# Altium PCB PCB-CPU-fixe1.PcbDoc (part 3 of 3)
Units mil, origin at the board's own origin, x right, y up, seen from the top; angles counter-clockwise.
Board outline 6040 x 4120 mil, 6 copper layers (Top Layer, GND, Mid-Layer2, Mid-Layer3, VDD33, Bottom Layer); 111 components, 315 nets, 963 pads, 730 vias.
Unrouted connection lines stored in the file: 3.
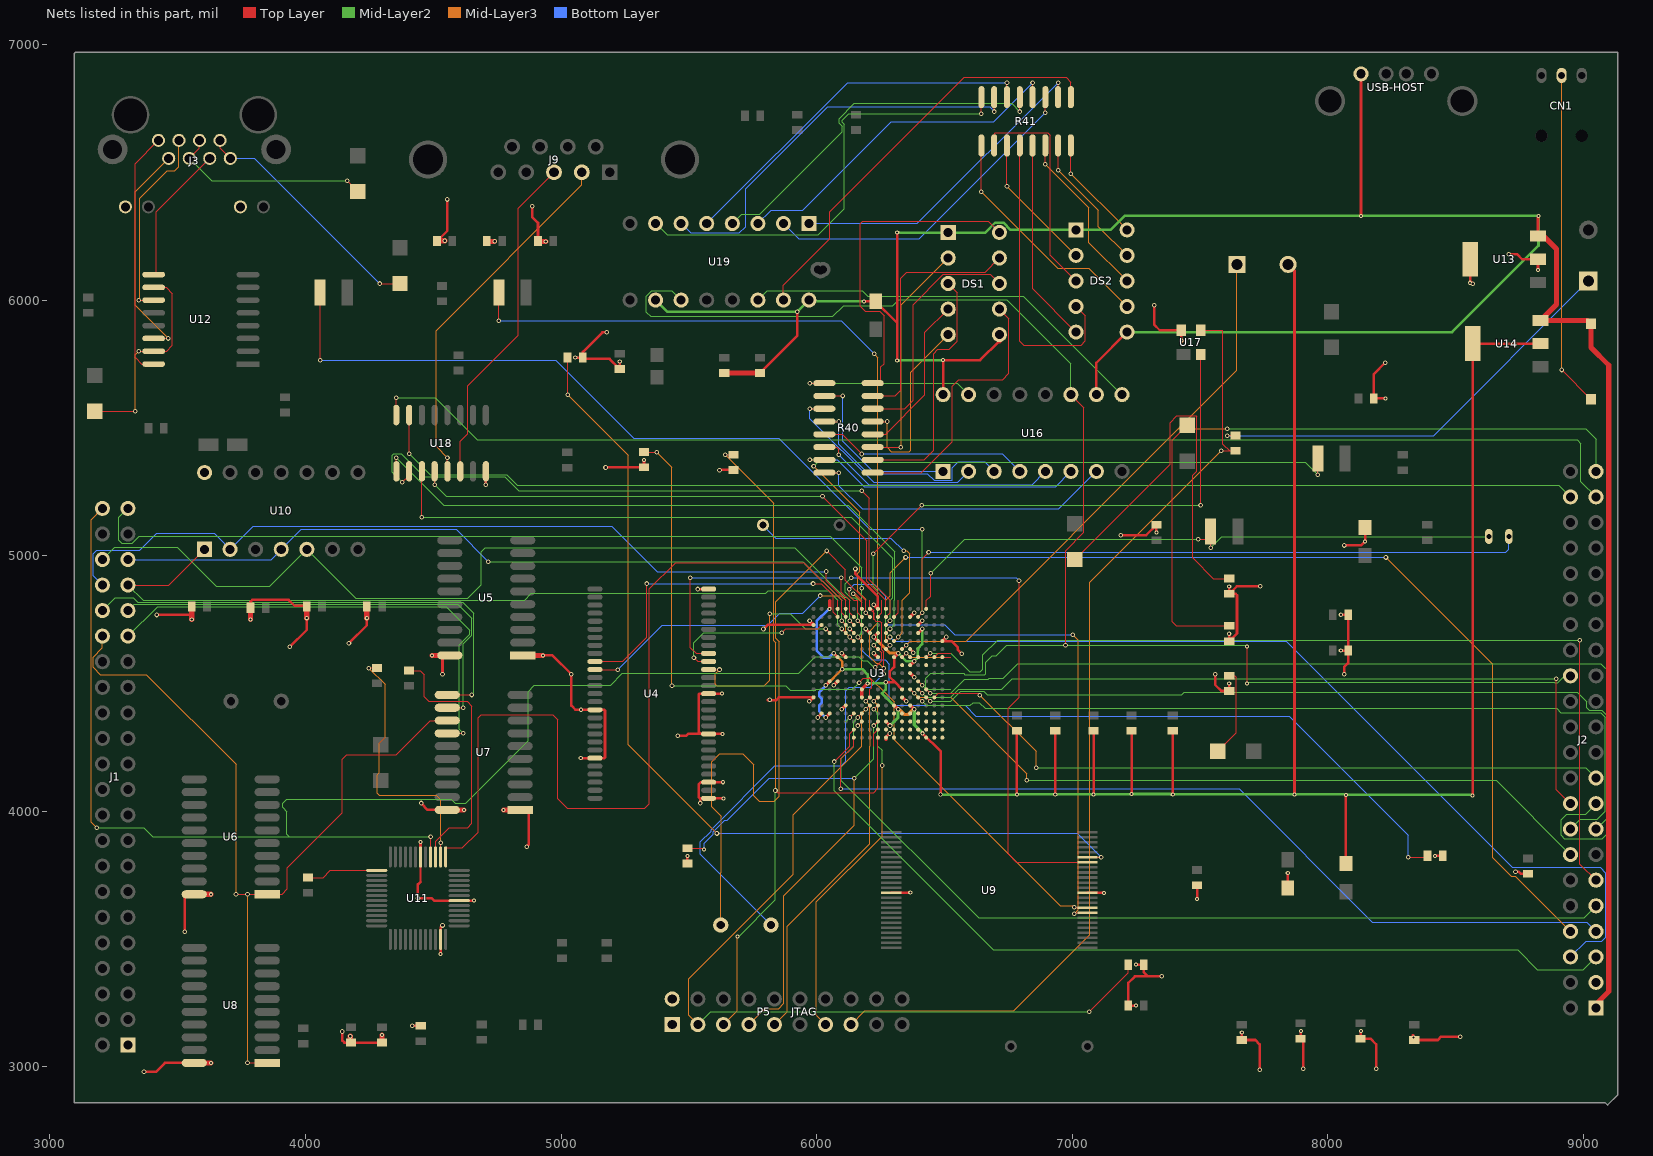
[diagram p7: the nets of this part, all layers, seen from the top]

## Via types
v1: diameter 18, hole 10, Top Layer to Bottom Layer, 574 vias
v2: diameter 16, hole 8, Top Layer to Bottom Layer, 155 vias
v3: diameter 16, hole 12, Top Layer to Bottom Layer, 1 vias

## Nets (pads, with @x,y where several pads share a name; then routed paths per layer and width w, separated by ;. In a path a pad name is that pad's centre, name@x,y a point inside that pad or via, vN(x,y) a via of type N, cw(c..) or ccw(c..) an arc to the next point about the centre after c; other vN are vias at no path point) (continued)
NetD2_2: D2.2 R23.2 | length 1542.8
  Top Layer w4: R23.2@7010,4985 7383,5358 7383,5521 7409,5547 7485,5547 7487,5545 7487,5331 7471,5315 7471,4992.47 7553,4910.47 D2.2@7614.58,4910.47
NetD3_2: D3.2 R24.2 | length 1021.8
  Top Layer w4: R24.2@7450,5510 7392,5452 7392,4741.47 7408,4725.47 D3.2@7614.58,4725.47
NetD4_2: D4.2 R25.2 | length 349.3
  Top Layer w4: R25.2@7570,4234.86 7642,4306.86 7642,4524.47 7636,4530.47 D4.2@7614.58,4530.47
NetDS1_2: DS1.2 R40.11 | length 927.1
  Top Layer w4: R40.11@6219.49,5425 v1(6330,5425)
  Mid-Layer3 w4: v1(6330,5425) 6331,5426 6331,5981 DS1.2@6515,6165
NetDS1_3: DS1.3 R40.10 | length 986
  Top Layer w4: R40.10@6219.49,5375 6421,5375 6458,5412 6458,5791 6475,5808 6519,5808 6551,5840 6551,6029 DS1.3@6515,6065
NetDS1_4: DS1.4 R40.12 | length 642
  Top Layer w4: R40.12@6219.49,5475 6270,5475 6424,5629 6424,5874 DS1.4@6515,5965
NetDS1_5: DS1.5 R40.13 | length 772.5
  Top Layer w4: R40.13@6219.49,5525 v1(6276,5525)
  Mid-Layer3 w4: v1(6276,5525) 6276,5424 6293,5407 6363,5407 6368,5412 6368,5718 DS1.5@6515,5865
NetDS1_7: DS1.7 R40.9 | length 1087.7
  Top Layer w4: R40.9@6219.49,5325 6410,5325 6531,5446 6531,5663 6557,5689 6728,5689 6752,5713 6752,5928 DS1.7@6715,5965
NetDS1_8: DS1.8 R40.14 | length 947.3
  Top Layer w4: R40.14@6219.49,5575 6345,5575 6378,5608 6378,5982.53 6496,6100.53 6679.47,6100.53 DS1.8@6715,6065
NetDS1_9: DS1.9 R40.15 | length 976.7
  Top Layer w4: R40.15@6219.49,5625 6308,5625 6330,5647 6330,6086.53 6352.47,6109 6659,6109 DS1.9@6715,6165
NetDS1_10: DS1.10 R40.16 | length 1297.2
  Top Layer w4: R40.16@6219.49,5675 6251,5675 6251,5739 6264,5752 6264,5939 6247,5956 6191,5956 6171,5976 6171,6298 6181,6308 6672,6308 DS1.10@6715,6265
NetDS2_2: DS2.2 R41.11 | length 542.3
  Top Layer w4: v1(6745,6445) R41.11@6745,6605.51
  Mid-Layer3 w4: v1(6745,6445) DS2.2@7015,6175
NetDS2_3: DS2.3 R41.10 | length 881.5
  Top Layer w4: R41.10@6695,6605.51 6695,6650 6700,6655 6904,6655 6914,6645 6914,6176 DS2.3@7015,6075
NetDS2_4: DS2.4 R41.12 | length 1185.5
  Top Layer w4: R41.12@6795,6605.51 6795,5840 6811,5824 7035,5824 7052,5841 7052,5938 DS2.4@7015,5975
NetDS2_5: DS2.5 R41.13 | length 800.9
  Top Layer w4: R41.13@6845,6605.51 6845,6045 DS2.5@7015,5875
NetDS2_7: DS2.7 R41.9 | length 937.5
  Top Layer w4: v1(6645,6424) R41.9@6645,6605.51
  Mid-Layer3 w4: v1(6645,6424) 6944,6125 7065,6125 DS2.7@7215,5975
NetDS2_8: DS2.8 R41.14 | length 663.1
  Top Layer w4: v1(6895,6531) R41.14@6895,6605.51
  Mid-Layer3 w4: v1(6895,6531) 7065,6361 7065,6225 DS2.8@7215,6075
NetDS2_9: DS2.9 R41.15 | length 542.3
  Top Layer w4: v1(6945,6508) R41.15@6945,6605.51
  Mid-Layer3 w4: v1(6945,6508) 7102,6351 7102,6288 DS2.9@7215,6175
NetDS2_10: DS2.10 R41.16 | length 421.6
  Top Layer w4: v1(6995,6495) R41.16@6995,6605.51
  Mid-Layer3 w4: v1(6995,6495) DS2.10@7215,6275
NetJ3_1: J3.1 U12.16 | length 970.4
  Top Layer w4: U12.16@3405.71,5750 3359,5750 3333,5776 3333,6533.59 J3.1@3424.45,6625.04
NetJ3_2: J3.2 U12.14 | length 870.6
  Top Layer w4: U12.14@3405.71,5850 v1(3463,5850)
  Mid-Layer3 w4: v1(3463,5850) 3333,5980 3333,6423.35 J3.2@3464.61,6554.96
NetJ3_3: J3.3 U12.11 | length 764.6
  Top Layer w4: v1(3348,6000) U12.11@3405.71,6000
  Mid-Layer3 w4: v1(3348,6000) 3352,6004 3352,6399 3459.06,6506.06 3488,6506.06 3504.76,6522.82 J3.3@3504.76,6625.04
NetJ3_4: J3.4 J3.5 R20.1 | length 800.6
  Top Layer w4: J3.4@3544.92,6554.96 3585.08,6595.12 J3.5@3585.08,6625.04 ; v1(4163,6467) R20.1@4205,6425
  Mid-Layer2 w4: J3.4@3544.92,6554.96 3632.88,6467 v1(4163,6467)
NetJ3_6: J3.6 U12.9 | length 551.9
  Top Layer w4: U12.9@3405.71,6100 3416,6100 3416,6345.72 J3.6@3625.24,6554.96
NetJ3_7: J3.7 J3.8 R21.1 | length 954.1
  Top Layer w4: J3.7@3665.39,6625.04 3665.39,6595.12 J3.8@3705.55,6554.96 ; v1(4290,6065) R21.1@4370,6065
  Bottom Layer w4: J3.8@3705.55,6554.96 3800.04,6554.96 v1(4290,6065)
NetR3_1: R3.1 U9.19 | length 3699.3
  Top Layer w4: v1(5025.47,5630.53) R3.1@5025.47,5775.42 ; U9.19@7060,3819.33 v1(7113,3819.33)
  Mid-Layer3 w4: v1(5025.47,5630.53) 5263,5393 5263,4260 v1(5610,3913)
  Bottom Layer w4: v1(5610,3913) 7019.33,3913 v1(7113,3819.33)
NetR16_2: R16.2 U11.39 | length 1045.4
  Top Layer w4: R16.2@4404.58,4550.47 4448,4550.47 4465,4533.47 4465,4448 4483,4430 4632,4430 4651,4411 4651,3952 4635,3936 4562.1,3936 4508.9,3882.8 U11.39@4508.9,3821.42
NetR17_2: R17.2 U11.38 | length 1045.2
  Top Layer w4: v1(4247,4560) 4247.47,4560.47 R17.2@4279.58,4560.47 ; U11.38@4528.58,3821.42 4528.58,3875.58 v1(4529,3876)
  Mid-Layer3 w4: v1(4247,4560) 4311,4496 4311,4289 4288,4266 4288,4150.5 4280,4142.5 4280,4070 4288,4062 4512,4062 4529,4045 v1(4529,3876)
NetR18_2: R18.2 U11.1 | length 280.5
  Top Layer w4: R18.2@4009.58,3740.47 4069.21,3740.47 4097,3768.27 U11.1@4278.58,3768.27
NetR19_1: R19.1 U12.10 U12.15 | length 826
  Top Layer w4: R19.1@3175,5565 v1(3334,5565) ; v1(3348.02,5800) U12.15@3405.71,5800 3456,5800 3479,5823 3479,6025 3454,6050 U12.10@3405.71,6050
  Mid-Layer3 w4: v1(3334,5565) 3334,5785.98 v1(3348.02,5800)
NetR28_2: R28.2 S2.1 | length 1696.4
  Top Layer w4: v1(7607,5470) 7607.47,5470.47 R28.2@7639.58,5470.47
  Bottom Layer w4: v1(7607,5470) 8415,5470 S2.1@9020,6075
NetR40_1: R40.1 U16.15 | length 696.2
  Top Layer w4: v1(5974,5675) R40.1@6030.51,5675
  Mid-Layer2 w4: v1(5974,5675) 6550,5675 U16.15@6595,5630
NetR40_2: R40.2 U16.1 | length 690.1
  Top Layer w4: R40.2@6030.51,5625 v1(6102,5625)
  Bottom Layer w4: v1(6102,5625) 6103,5624 6103,5447.4 6220.4,5330 U16.1@6495,5330
NetR40_3: R40.3 U16.2 | length 837.9
  Top Layer w4: v1(5974,5575) R40.3@6030.51,5575
  Bottom Layer w4: v1(5974,5575) 5974,5536.03 6223.56,5286.47 6551.47,5286.47 U16.2@6595,5330
NetR40_4: R40.4 U16.3 | length 885.9
  Top Layer w4: R40.4@6030.51,5525 v1(6087,5525)
  Bottom Layer w4: v1(6087,5525) 6087,5437.03 6203.03,5321 6432.94,5321 6459.47,5294.47 6530.53,5294.47 6531,5294.94 6531,5344.47 6553.53,5367 6658,5367 U16.3@6695,5330
NetR40_5: R40.5 U16.4 | length 824.5
  Top Layer w4: R40.5@6030.51,5475 6100,5475 v1(6177,5398)
  Bottom Layer w4: v1(6177,5398) 6727,5398 U16.4@6795,5330
NetR40_6: R40.6 U16.5 | length 959.2
  Top Layer w4: R40.6@6030.51,5425 6079,5425 6087,5417 v1(6087,5395.44)
  Bottom Layer w4: v1(6087,5395.44) 6203.96,5278.47 6843.47,5278.47 U16.5@6895,5330
NetR40_7: R40.7 U16.6 | length 1145.5
  Top Layer w4: v1(5974,5375) R40.7@6030.51,5375
  Bottom Layer w4: v1(5974,5375) 6081,5375 6185.53,5270.47 6935.47,5270.47 U16.6@6995,5330
NetR40_8: R40.8 U16.7 | length 1214.1
  Top Layer w4: R40.8@6030.51,5325 v1(6087,5325)
  Bottom Layer w4: v1(6087,5325) 6087,5274 6178,5183 6948,5183 U16.7@7095,5330
NetR41_1: R41.1 U19.15 | length 1648.6
  Top Layer w4: U19.15@5870,6000 5870,6058 6052,6240 6052,6346 6578,6872 6976,6872 6995,6853 R41.1@6995,6794.49
NetR41_2: R41.2 U19.1 | length 1259.7
  Top Layer w4: R41.2@6945,6794.49 v1(6945,6851)
  Bottom Layer w4: U19.1@5970,6300 6394,6300 v1(6945,6851)
NetR41_3: R41.3 U19.2 | length 1315
  Top Layer w4: v1(6895,6734) R41.3@6895,6794.49
  Bottom Layer w4: U19.2@5870,6300 5930,6240 6401,6240 v1(6895,6734)
NetR41_4: R41.4 U19.3 | length 1359.7
  Top Layer w4: R41.4@6845,6794.49 v1(6845,6851)
  Bottom Layer w4: U19.3@5770,6300 5822,6352 5946,6352 6293,6699 6693,6699 v1(6845,6851)
NetR41_5: R41.5 U19.4 | length 1436.5
  Top Layer w4: v1(6795,6738) R41.5@6795,6794.49
  Mid-Layer2 w4: U19.4@5670,6300 5707,6337 5778,6337 6100,6659 6100,6680.47 6088,6692.47 6088,6710.47 6147.53,6770 6763,6770 v1(6795,6738)
NetR41_6: R41.6 U19.5 | length 1459.7
  Top Layer w4: R41.6@6745,6794.49 v1(6745,6851)
  Bottom Layer w4: U19.5@5570,6300 6121,6851 v1(6745,6851)
NetR41_7: R41.7 U19.6 | length 1594.6
  Top Layer w4: v1(6695,6738) R41.7@6695,6794.49
  Bottom Layer w4: U19.6@5470,6300 5507,6263 5698,6263 5723,6288 5723,6435 6044,6756 6677,6756 v1(6695,6738)
NetR41_8: R41.8 U19.7 | length 1768.6
  Top Layer w4: v1(6645,6729) R41.8@6645,6794.49
  Mid-Layer2 w4: U19.7@5370,6300 5415,6255 6006,6255 6108,6357 6108,6688.47 6101,6695.47 6101,6704 6126,6729 v1(6645,6729)
NetU16_9: U16.9 U19.14 | length 1608.9
  Mid-Layer2 w4: U19.14@5770,6000 5807,6037 6179,6037 6200,6016 6809,6016 U16.9@7195,5630
NFCE: U3.G17 U9.9 | length 1744.1
  Top Layer w4: v1(6143,4851) 6150.85,4851 6177.01,4824.84 U3.G17@6177.01,4791.97 ; v1(7008,3623.45) 7008.97,3622.48 U9.9@7060,3622.48
  Mid-Layer3 w4: v1(6143,4851) 6177,4817 6177,4554 6303,4428 6303,4280.48 6953,3630.48 7000.97,3630.48 v1(7008,3623.45)
NFRE: U3.G16 U9.8 | length 2322.8
  Top Layer w4: v1(6128,4868) 6127,4867 6127,4844 6146.16,4824.84 6161.26,4824.84 6161.26,4776.22 U3.G16@6177.01,4760.47 ; v1(7008,3599) 7011.8,3602.8 U9.8@7060,3602.8
  Mid-Layer3 w4: v1(7003,4690) 7023,4670 7023,3614 v1(7008,3599)
  Bottom Layer w4: v1(6128,4868) 6148,4888 6225,4888 6271,4842 6271,4738 6280,4729 6502,4729 6541,4690 v1(7003,4690)
NFWE: U3.G15 U9.18 | length 2304.7
  Top Layer w4: v1(6161.26,4744.72) U3.G15@6177.01,4728.98 ; v1(6792,4902) 6792,4445.95 6749,4402.95 6749,3832.79 6782.14,3799.65 U9.18@7060,3799.65
  Mid-Layer2 w4: v1(6135.66,4913.52) 6112,4889.87 6112,4856.16 6133.16,4835 6151.1,4835 6161.26,4824.84 v1(6161.26,4744.72)
  Bottom Layer w4: v1(6135.66,4913.52) 6780.48,4913.52 v1(6792,4902)
NGCS0: U3.D17 | length 32.9
  Top Layer w4: U3.D17@6082.52,4791.97 6082.52,4824.84
NGCS1: J1.39 U3.E15 U10.4 | length 3059.8
  Top Layer w4: v1(6098.27,4744.72) U3.E15@6114.02,4728.98
  Mid-Layer2 w4: v1(4715,4977) 5946.11,4977 6098.27,4824.84 v1(6098.27,4744.72)
  Bottom Layer w4: J1.39@3305,4985 3865,4985 U10.4@3905,5025 3983,5103 4589,5103 v1(4715,4977)
NGCS2: U3.E16 U11.37 | length 3417.4
  Top Layer w4: U11.37@4548.27,3821.42 4548.27,3857 4614,3857 4675,3918 4675,4365 4687,4377 4968,4377 4987,4358 4987,4049 5024,4012 5327,4012 5345,4030 5345,4870 5448,4973 5950.11,4973 6098.27,4824.84 6098.27,4776.22 U3.E16@6114.02,4760.47
NGCS3: J1.37 U3.E14 U10.1 | length 3330.7
  Top Layer w4: J1.37@3305,4885 3465,4885 U10.1@3605,5025 ; v1(6098.27,4713.23) U3.E14@6114.02,4697.48
  Mid-Layer2 w4: J1.37@3305,4885 3364,4826 4857,4826 4884,4853 5801,4853 5810,4862 6045.36,4862 6082.52,4824.84 6082.52,4728.98 v1(6098.27,4713.23)
NGCS4: J1.38 U3.E17 U10.2 | length 3353.7
  Top Layer w4: v1(6037,4938) 6037,4901.86 6114.02,4824.84 U3.E17@6114.02,4791.97
  Bottom Layer w4: J1.38@3205,4885 3169,4921 3169,5008 3183,5022 3352,5022 3417,5087 3643,5087 U10.2@3705,5025 3796,5116 5199.27,5116 5377.27,4938 v1(6037,4938)
NGCS5: J1.40 U3.F15 U10.5 | length 3493.4
  Top Layer w4: v1(6129.76,4744.72) U3.F15@6145.51,4728.98
  Mid-Layer2 w4: J1.40@3205,4985 3253.47,5033.47 3497.53,5033.47 3651,4880 3860,4880 U10.5@4005,5025 4196,4834 4635,4834 4688,4887 4688,5016 4704,5032 5913.5,5032 6107.39,4838.11 6116.49,4838.11 6129.76,4824.84 v1(6129.76,4744.72)
NOE: J1.34 U6.1 U7.13 U8.1 | length 3377.8
  Top Layer w4: v1(3728,3675) v1(3773,3675) U6.1@3850,3675 3908,3675 3929,3696 3929,3779 4144,3994 4144,4204 4161,4221 4355,4221 4489,4355 U7.13@4554.57,4355 ; v1(3773,3015) U8.1@3850,3015
  Mid-Layer3 w4: J1.34@3205,4685 3205,4639 3169.47,4603.47 3169.47,4562.53 3197,4535 3376,4535 3728,4183 v1(3728,3675) ; v1(3773,3015) v1(3773,3675)
NRESET: J1.44 U3.J12 U11.40 U17.2 | length 7945.7
  Top Layer w4: U11.40@4489.21,3821.42 v1(4489.21,3900) ; v1(6222,5008) v1(6412,5198) ; v1(6224.25,4650.24) U3.J12@6240,4634.49 6254,4620.49 6254,4588 v1(6230,4564) ; v1(7502.4,5198) U17.2@7502.4,5787.76
  Mid-Layer2 w4: v1(3183,3935) 3367,3935 3402,3900 3936,3900 ; v1(4489.21,3900) 3936,3900 ; v1(6222,5008) 6222,4880 6240,4862 6240,4665.98 v1(6224.25,4650.24) ; v1(6230,4564) 6222.89,4564 6198.89,4588 6180,4588 6164.28,4603.72 5995,4603.72 5930.28,4539 5240,4539 5194,4493 4896,4493 4871,4468 4871,4276 4627,4032 4585,4032 4570,4047 3926,4047 3910,4031 3910,4015 3927,3998 3927,3909 3936,3900 ; v1(6412,5198) v1(7502.4,5198)
  Mid-Layer3 w4: v1(3183,3935) 3161.47,3956.53 3161.47,5141.47 J1.44@3205,5185
NRSTOUT: U3.J16 | length 70.9
  Top Layer w4: U3.J16@6240,4760.47 6255.75,4776.22 6255.75,4824.84
NSCAS: U3.C14 U4.17 | length 856.1
  Top Layer w4: U4.17@5577.44,4554.49 v1(5620,4554.49) ; v1(6035.28,4713.23) U3.C14@6051.02,4697.48
  Mid-Layer2 w4: v1(5817,4772.28) 5896.1,4772.28 5955.16,4713.23 v1(6035.28,4713.23)
  Mid-Layer3 w4: v1(5620,4554.49) 5604,4538.49 5604,4497 5610,4491 5796,4491 5817,4512 v1(5817,4772.28)
NSCKE: U3.D16 U4.37 | length 1292.6
  Top Layer w4: U4.37@5132.56,4585.98 5240.98,4585.98 5335,4680 5335,4890 v1(5336,4891) ; v1(5986,4891) 6018.86,4891 6065,4844.86 6065,4825 6065,4797.81 6065.02,4777.97 U3.D16@6082.52,4760.47
  Bottom Layer w4: v1(5336,4891) v1(5986,4891)
NSCLK0: U3.F13 U4.38 | length 1281.6
  Top Layer w4: U4.38@5132.56,4554.49 5221.51,4554.49 v1(5222,4554) ; v1(6129.76,4681.73) U3.F13@6145.51,4665.98
  Mid-Layer3 w4: v1(6015,4844) 6094.86,4844 6114.02,4824.84 6114.02,4697.48 v1(6129.76,4681.73)
  Bottom Layer w4: v1(5222,4554) 5396,4728 5809,4728 5856,4775 5946,4775 v1(6015,4844)
NSCLK1: U3.F14 | length 140.4
  Top Layer w4: v1(6129.76,4713.23) U3.F14@6145.51,4697.48
  Mid-Layer2 w4: 6114.02,4824.84 6114.02,4728.98 v1(6129.76,4713.23)
NSCS0: U3.F16 U4.19 | length 1117.4
  Top Layer w4: v1(5506,4913) 5506,4640 5528.52,4617.48 U4.19@5577.44,4617.48 ; v1(6097,4913) 6097,4857.61 6129.76,4824.84 6129.76,4776.22 U3.F16@6145.51,4760.47
  Bottom Layer w4: v1(5506,4913) v1(6097,4913)
NSRAS: U3.B15 U4.18 | length 650.8
  Top Layer w4: v1(5520,4601) 5535.02,4585.98 U4.18@5577.44,4585.98 ; v1(5864,4698) 5879.23,4713.23 5955.16,4713.23 6003.78,4713.23 U3.B15@6019.53,4728.98
  Mid-Layer2 w4: v1(5520,4601) 5520,4660 5558,4698 v1(5864,4698)
NSRST: "P5      JTAG.15" R28.1 U17.3 | length 3812.6
  Top Layer w4: U17.3@7502.4,5882.24 7589,5882.24 7590,5881.24 7590,5436.47 7616,5410.47 ; v1(7583.47,5410.47) 7616,5410.47 ; R28.1@7639.58,5410.47 7616,5410.47
  Mid-Layer3 w4: 6135,3165 6189,3219 6772,3219 7069,3516 7069,4896 v1(7583.47,5410.47)
NTRST: "P5      JTAG.3" R34.2 U3.H5 | length 3358.3
  Top Layer w4: v1(6192.76,4398.27) U3.H5@6208.5,4414.02 ; v1(7067.05,3215) 7219.53,3367.47 R34.2@7219.53,3399.58
  Mid-Layer2 w4: 5535,3165 5585,3215 v1(7067.05,3215)
  Mid-Layer3 w4: 5535,3165 5499,3201 5499,3344 5908,3753 5908,3986.15 6177.01,4255.16 6177.01,4382.52 v1(6192.76,4398.27)
NWAIT: J1.43 R1.1 U3.G13 | length 6567.2
  Top Layer w4: v1(6161.26,4681.73) U3.G13@6177.01,4665.98 v1(6162,4680.99) ; v1(8315,3820) 8390.47,3820 R1.1@8390.47,3825.42
  Mid-Layer2 w4: J1.43@3305,5185 3269.47,5149.47 3269.47,5060 3280.47,5049 3322,5049 3350,5077 6053,5077 6177,4953 v1(6177,4873) ; v1(6161.26,4681.73) 6177.01,4697.48 6177.01,4824.84 ; v1(6162,4680.99) 6177,4695.99 6177,4824.85 ; 6177,4824.85 v1(6177,4873) ; 6177,4824.85 6176,4825.85 6176,4873 v1(6177,4873)
  Bottom Layer w4: v1(6177,4873) 6177,4630 6215,4592 6269,4592 6285,4576 6285,4433 6304,4414 6581,4414 6623,4372 7849,4372 8315,3906 v1(8315,3820)
NWBE0: J1.36 U7.11 | length 1916.7
  Top Layer w4: U7.11@4554.57,4455 v1(4650,4455)
  Mid-Layer2 w4: J1.36@3205,4785 3255,4835 3326,4835 3344,4817 4615,4817 4658,4774 4658,4463 v1(4650,4455)
NWBE1: J1.35 U7.12 | length 1803.4
  Top Layer w4: U7.12@4554.57,4405 v1(4617,4405)
  Mid-Layer2 w4: J1.35@3305,4785 3329,4809 4596,4809 4650,4755 4650,4688 4617,4655 v1(4617,4405)
NWE: J1.33 U7.14 | length 1913.2
  Top Layer w4: U7.14@4554.57,4305 v1(4617,4305)
  Mid-Layer2 w4: J1.33@3305,4685 3421,4801 4550,4801 4642,4709 4642,4692 4601,4651 4601,4321 v1(4617,4305)
NXPON: U3.U11 | length 32.9
  Top Layer w4: U3.U11@6491.97,4602.99 6524.84,4602.99
NYPON: U3.M11 | length 203.4
  Top Layer w4: U3.M11@6334.49,4602.99 v1(6350.24,4618.74)
  Mid-Layer3 w4: v1(6350.24,4618.74) 6365.98,4602.99 6524.84,4602.99
PDN0: U3.N11
PDP0: U3.M10 | length 1
  Top Layer w4: U3.M10@6334.49,4570.51 U3.M10@6334.49,4571.5
RS232RXD0: J9.2 U18.13 | length 1424.7
  Top Layer w4: U18.13@4555.44,5330.31 v1(4555.44,5383)
  Mid-Layer3 w4: v1(4555.44,5383) 4511,5427.44 4511,5880.62 5081.38,6451 J9.2@5081.38,6500.31
RS232RXD1: J2.41 U18.8 | length 5010.3
  Top Layer w4: U18.8@4355.44,5550.31 v1(4355.44,5618)
  Mid-Layer2 w4: v1(4355.44,5618) 4507,5618 4672,5453 8976,5453 8991,5438 8991,5289 J2.41@9050,5230
RS232TXD0: J9.3 U18.14 | length 1322
  Top Layer w4: U18.14@4605.44,5330.31 4605.44,5448 4634,5476.56 4634,5665 4832,5863 4832,6359.94 J9.3@4972.38,6500.31
RS232TXD1: J2.42 U18.7 | length 4765.9
  Top Layer w4: v1(4405.44,5399) U18.7@4405.44,5550.31
  Mid-Layer2 w4: v1(4405.44,5399) 4487.44,5317 4787,5317 4828,5276 8904,5276 J2.42@8950,5230
RXD0: U3.K17 U18.12 | length 2132.5
  Top Layer w4: v1(4505.44,5277) U18.12@4505.44,5330.31 ; v1(6023,5232) 6197,5058 6197,4899.34 6271.5,4824.84 U3.K17@6271.5,4791.97
  Mid-Layer2 w4: v1(4505.44,5277) 4550.44,5232 v1(6023,5232)
RXD1: U3.K14 U18.9 | length 2488.1
  Top Layer w4: U18.9@4355.44,5330.31 v1(4355.44,5383) ; U3.K14@6271.5,4697.48 v1(6287.24,4713.23)
  Mid-Layer2 w4: v1(4355.44,5383) 4540.44,5198 6124,5198 6306,5016 6306,4827.85 6302.99,4824.84 6302.99,4728.98 v1(6287.24,4713.23)
RXD2: J2.8 U3.K12 | length 4055.2
  Top Layer w4: U3.K12@6271.5,4634.49 v1(6287.24,4650.24)
  Mid-Layer3 w4: v1(6287.24,4650.24) 6271.5,4665.98 6271.5,4824.84 6289,4842.35 6289,4934 v1(6348,4993) ; v1(8228,4993) 8643,4578 8643,3820.09 8717.57,3745.52 8734.48,3745.52 J2.8@8950,3530
  Bottom Layer w4: v1(6348,4993) v1(8228,4993)
SDCLK: J2.19 U3.T6 | length 2770.8
  Top Layer w4: U3.T6@6460.47,4445.51 6476.22,4461.26 6524.84,4461.26 6631.74,4461.26 v1(6639,4454)
  Mid-Layer2 w4: v1(6859,4170) 9010,4170 J2.19@9050,4130
  Mid-Layer3 w4: v1(6639,4454) 6859,4234 v1(6859,4170)
SDCMD: J2.16 U3.P6 | length 3264.1
  Top Layer w4: U3.P6@6397.48,4445.51 v1(6413.23,4429.76)
  Mid-Layer2 w4: v1(6413.23,4429.76) 6428.98,4414.02 6524.84,4414.02 6602.02,4414.02 6613,4425 6637,4425 6660,4402 8896,4402 8912,4386 9068,4386 9087,4367 9087,4000 9055,3968 8988,3968 J2.16@8950,3930
SDDATA0: J2.15 U3.R6 | length 3212.8
  Top Layer w4: U3.R6@6428.98,4445.51 v1(6444.72,4429.76)
  Mid-Layer2 w4: v1(6444.72,4429.76) 6524.84,4429.76 6564.08,4469 6654,4469 6668,4455 7428,4455 7439,4466 8977,4466 9014.47,4428.53 9014.47,4404 9024,4394.47 9072,4394.47 9095,4371.47 9095,3975 J2.15@9050,3930
SDDATA1: J2.14 U3.N7 | length 2867.5
  Top Layer w4: U3.N7@6365.98,4477.01 v1(6381.73,4461.26)
  Mid-Layer2 w4: v1(6823,4121) 8659,4121 J2.14@8950,3830
  Mid-Layer3 w4: v1(6381.73,4461.26) 6397.48,4445.51 6524.84,4445.51 6823,4147.35 v1(6823,4121)
SDDATA2: J2.18 U3.P7 | length 3051.4
  Top Layer w4: U3.P7@6397.48,4477.01 v1(6413.23,4461.26) ; v1(8895,4518) 8895,4085 J2.18@8950,4030
  Mid-Layer2 w4: v1(6413.23,4461.26) 6428.98,4445.51 6524.84,4445.51 6556.33,4477 6724.89,4477 6765.89,4518 v1(8895,4518)
SDDATA3: J2.17 U3.R7 | length 3796.2
  Top Layer w4: U3.R7@6428.98,4477.01 v1(6444.72,4461.26)
  Mid-Layer2 w4: v1(6444.72,4461.26) 6524.84,4461.26 6579.58,4516 6672.14,4516 6676.14,4520 6731,4520 6788,4577 9069,4577 9103,4543 9103,3921 9075,3893 8925,3893 8913,3905 8913,3967 8935,3989 9009,3989 J2.17@9050,4030
SDWP: U3.L16 | length 70.9
  Top Layer w4: U3.L16@6302.99,4760.47 6318.74,4776.22 6318.74,4824.84
SPICLK0: J2.28 U3.P8 U16.11 U19.11 | length 6128.7
  Top Layer w4: U3.P8@6397.48,4508.5 v1(6413.23,4492.76) ; v1(6974,4650) 6974,5020 7046,5092 7046,5579 U16.11@6995,5630 ; v2(7685,4500) v2(7685,4645)
  Mid-Layer2 w4: U19.11@5470,6000 5434,6036 5354,6036 5333,6015 5333,5953 5350,5936 6064,5936 6107,5979 6298,5979 6321,6002 6745,6002 6995,5752 U16.11@6995,5630 ; v1(6413.23,4492.76) 6428.98,4477.01 6524.84,4477.01 ; 6435.99,4477.01 6428,4485 6428,4520 6447,4539 6575.54,4539 6580,4534.54 6657.54,4534.54 6661.14,4538.14 6661.14,4582.14 6687,4608 6703,4608 6745,4650 v1(6974,4650) 7680,4650 v2(7685,4645) ; v2(7685,4500) 7690,4505 8886.79,4505 8888.79,4503 8901.21,4503 8928.21,4530 J2.28@8950,4530
SPICLK1: U3.R10
TCK: "P5      JTAG.9" R37.2 U3.H6 | length 3316.6
  Top Layer w4: R37.2@5324.58,5405.47 v1(5374,5405.47) ; v1(6166,4503) 6183,4520 6206,4520 6215,4511 6215,4484 6208.5,4477.5 U3.H6@6208.5,4445.51 v1(6192.76,4429.76)
  Mid-Layer2 w4: v1(5434,4491) 5879.07,4491 5896.07,4474 5995.62,4474 5998.62,4477 6140,4477 v1(6166,4503)
  Mid-Layer3 w4: v1(5374,5405.47) 5434,5345.47 v1(5434,4491) ; 5835,3165 5885,3215 5885,3550 6208.5,3873.5 6208.5,4255.16 6209.26,4255.91 6209.26,4310.47 6208.5,4311.22 6208.5,4414.02 v1(6192.76,4429.76)
TCLK0: J2.9 U3.G4 | length 3490.6
  Top Layer w4: v1(6161.26,4366.77) U3.G4@6177.01,4382.52
  Mid-Layer2 w4: v1(6161.26,4366.77) 6145.51,4351.02 6145.51,4255.16 6097,4206.65 6097,4120 6634,3583 9003,3583 J2.9@9050,3630
TCLK1: J2.11 U3.R11 | length 3643.8
  Top Layer w4: U3.R11@6428.98,4602.99 v1(6444.72,4618.74) ; v1(8986,4669) 8987,4668 8987,3793 J2.11@9050,3730
  Mid-Layer2 w4: v1(6444.72,4618.74) 6524.84,4618.74 6598.58,4545 6640,4545 6651,4556 6651,4612 6708,4669 v1(8986,4669)
TDI: "P5      JTAG.5" R35.2 U3.J1 | length 3046.1
  Top Layer w4: v1(5642,5395) 5642.47,5395.47 R35.2@5674.58,5395.47 ; v1(5839,4081) 5847,4073 6224,4073 6240,4089 6240,4255.16 U3.J1@6240,4288.03
  Mid-Layer2 w4: v2@5690,3505 v2(5690,3510) ; v2@5692.5,3507.5 5839,3654 v1(5839,4081)
  Mid-Layer3 w4: 5635,3165 5690,3220 v2(5690,3510) ; v1(5642,5395) 5832.32,5204.68 5832.32,4666.97 5840,4659.29 5840,4082 v1(5839,4081)
TDO: "P5      JTAG.13" U3.J5 | length 1390.9
  Top Layer w4: v1(6224.25,4398.27) U3.J5@6240,4414.02
  Mid-Layer2 w4: v1(6224.25,4398.27) 6240,4382.52 6240,4255.16 6257,4238.16 v1(6257,4179)
  Mid-Layer3 w4: 6035,3165 5999,3201 5999,3645 6257,3903 v1(6257,4179)
TMS: "P5      JTAG.7" R36.2 U3.J3 | length 2222.5
  Top Layer w4: R36.2@5494.58,3855.47 5554.53,3855.47 v2(5560,3850) ; v1(6224.25,4335.28) U3.J3@6240,4351.02
  Mid-Layer2 w4: v1(6148,4129) 6224.25,4205.25 6224.25,4255.16 v1(6224.25,4335.28)
  Mid-Layer3 w4: 5735,3165 5798,3228 5851,3228 5872,3249 5872,3670 6148,3946 v1(6148,4129)
  Bottom Layer w4: v2@5560,3845 v2(5560,3850) 5560,3875 5595,3910 5595,3919.21 5640.79,3965 5650,3965 5814,4129 v1(6148,4129)
TOUT0: J2.5 U3.F2 | length 3562.9
  Top Layer w4: v1(6069,4194.39) 6129.76,4255.16 6129.76,4303.78 U3.F2@6145.51,4319.53
  Mid-Layer2 w4: v1(6069,4194.39) 6069,4080 6691,3458 8743,3458 8821,3380 9000,3380 J2.5@9050,3430
TOUT1: J2.7 U3.F1 | length 3407.1
  Top Layer w4: v1(6095,4088) 6095,4204.65 6145.51,4255.16 U3.F1@6145.51,4288.03
  Bottom Layer w4: v1(6095,4088) 7653,4088 8175,3566 9014,3566 J2.7@9050,3530
TOUT2: U3.F4 | length 44.5
  Top Layer w4: v1(6129.76,4366.77) U3.F4@6145.51,4382.52
  Mid-Layer2 w4: 6114.02,4351.02 v1(6129.76,4366.77)
TOUT3: U3.G3 | length 22.3
  Top Layer w4: v1(6161.26,4335.28) U3.G3@6177.01,4351.02
TXD0: U3.K15 U18.11 | length 2358.6
  Top Layer w4: v1(4455.44,5151) U18.11@4455.44,5330.31 ; U3.K15@6271.5,4728.98 v1(6287.24,4744.72)
  Mid-Layer2 w4: v1(4455.44,5151) 6135,5151 6297,4989 6297,4834.6 6287.24,4824.84 v1(6287.24,4744.72)
TXD1: U3.K16 U18.10 | length 2629.8
  Top Layer w4: v1(4378,5287) 4393,5302 4405.44,5302 U18.10@4405.44,5330.31 ; v1(6176,5254) 6206,5224 6206,4906.09 6287.24,4824.84 6287.24,4776.22 U3.K16@6271.5,4760.47
  Mid-Layer2 w4: v1(4378,5287) 4339,5326 4339,5393 4345,5399 4375,5399 4465,5309 4779,5309 4834,5254 v1(6176,5254)
TXD2: J2.6 U3.K13 | length 3798.2
  Top Layer w4: U3.K13@6271.5,4665.98 v1(6287.24,4681.73)
  Mid-Layer2 w4: 6271.5,4824.84 6271.5,4697.48 ; v1(6287,4682) 6271.5,4697.5 ; v1(6287.24,4681.73) 6271.5,4697.48
  Bottom Layer w4: v1(6287,4682) 6303,4666 7837,4666 8723,3780 9066,3780 9087,3759 9087,3505 9071,3489 9009,3489 J2.6@8950,3430
UPLLCAP: C2.2 U3.L13 | length 987.1
  Top Layer w4: U3.L13@6302.99,4665.98 v1(6318.74,4681.73)
  Mid-Layer3 w4: v1(6318.74,4681.73) 6334.49,4697.48 6334.49,4824.84 6364,4854.35 6364,5007 6352,5019 v1(6341,5019)
  Bottom Layer w4: C2.2@5790,5120 5841,5069 6291,5069 v1(6341,5019)
VCLK: U3.J2 | length 70.9
  Top Layer w4: 6224.25,4255.16 6224.25,4303.78 U3.J2@6240,4319.53
VD0: U3.L1
VD1: U3.L2
VD2: U3.L4
VD3: U3.M3
VD4: U3.M4
VD5: U3.M2
VD6: U3.N1
VD7: U3.N3
VD8: U3.N2
VD9: U3.N4
VD10: U3.P1
VD11: U3.P3
VD12: U3.P2
VD13: U3.T1
VD14: U3.R2
VD15: U3.U1
VD16: U3.T2
VD17: U3.R3
VD18: U3.R4
VD19: U3.U2
VD20: U3.T3
VD21: U3.U3
VD22: U3.T4
VD23: U3.P4
VDD18: C10.1 C11.1 C12.1 C13.1 C32.1 C48.1 D5.3 U3.C4 U3.C8 U3.C17 U3.D11 U3.G6 U3.G7 U3.J13 U3.J14 U3.K3 U3.L5 U3.L11 U3.M7 U3.N5 U3.N10 U3.P14 U3.R1 U14.2 U14.4 | length 10077.1
  Top Layer w10: v1(6035.28,4492.76) U3.C8@6051.02,4508.5 ; v1(6066.77,4618.74) U3.D11@6082.52,4602.99 ; v1(6270,4505) 6306.5,4505 ; U3.L11@6302.99,4602.99 6302.99,4563.86 6286.12,4546.99 6286.12,4525.38 6306.5,4505 ; U3.M7@6334.49,4477.01 6306.5,4505 ; U3.R1@6428.98,4288.03 6428.98,4291.02 v2(6415,4305) 6485,4235 v3(6485,4065) ; v2(6783.79,4066.21) C11.1@6783.79,4314.74 ; v2(6933.79,4066.21) C32.1@6933.79,4314.74 ; v2(7083.79,4066.21) C12.1@7083.79,4314.74 ; v2(7232.58,4067.42) C10.1@7232.58,4314.48 ; v2(7393.79,4066.21) C13.1@7393.79,4314.74 ; D5.3@7845,6140 7870,6115 v2(7870,4065) ; C48.1@8071.2,3795.44 v2(8071.2,4063.8) ; v2(8567.13,4062.13) U14.4@8567.13,5830 U14.2@8832.87,5830
  Top Layer w12.6: v1(6035.28,4366.77) U3.C4@6051.02,4382.52 ; v2(6051.02,4791.97) 6051.02,4824.84 ; U3.G6@6177.01,4445.51 U3.G7@6177.01,4477.01 v2(6200,4500) ; U3.J13@6240,4665.98 v1(6224.25,4681.73) U3.J14@6240,4697.48 ; U3.K3@6271.5,4351.02 v1(6287.24,4335.28) ; U3.L5@6302.99,4414.02 v1(6318.74,4398.27) ; U3.L11@6302.99,4602.99 v1(6318.74,4618.74) ; U3.N5@6365.98,4414.02 v1(6381.73,4398.27) ; U3.N10@6365.98,4571.5 v1(6381.73,4587.24) ; U3.P14@6397.48,4697.48 v1(6413.23,4713.23)
  Mid-Layer2 w10: v1(6100.24,4555.75) 6179.25,4555.75 6200,4535 v2(6200,4500) 6265,4500 v1(6270,4505) 6270,4475.51 6255.75,4461.26 v1(6318.74,4398.27) ; v1(6318.74,4618.74) 6350.24,4587.24 v1(6381.73,4587.24) 6396.47,4601.98 6396.47,4637.47 6413.23,4654.23 v1(6413.23,4713.23) ; v3(6485,4065) 6782.58,4065 v2(6783.79,4066.21) v2(6933.79,4066.21) v2(7083.79,4066.21) 7231.36,4066.21 v2(7232.58,4067.42) v2@7392.58,4067.42 ; v2(7393.79,4066.21) v2@8068.79,4066.21 ; v2(8071.2,4063.8) v2@8565.45,4063.8
  Mid-Layer2 w12.6: v1(6287.24,4335.28) 6318.74,4366.77 v1(6318.74,4398.27) ; v1(6381.73,4398.27) 6381.73,4338.27 v2(6415,4305)
  Mid-Layer3 w10: v1(6035.28,4492.76) 6037.25,4492.76 v1(6100.24,4555.75) 6100.24,4585.27 v1(6066.77,4618.74)
  Mid-Layer3 w12.6: v1(6224.25,4681.73) 6287.24,4618.74 v1(6318.74,4618.74) ; v1(6318.74,4398.27) 6322.94,4398.27 6342.24,4378.97 6358.23,4378.97 6377.53,4398.27 v1(6381.73,4398.27)
  Bottom Layer w10: v1(6035.28,4366.77) 6010,4392.05 6010,4413.92 6020.81,4424.73 6020.81,4439.65 6010,4450.46 6010,4464.83 6035.28,4490.11 v1(6035.28,4492.76) ; v2(6051.02,4791.97) 6047.63,4791.97 6000.39,4744.72 6000.39,4628.17 6027.82,4600.74 6048.77,4600.74 v1(6066.77,4618.74)
VDD33: "P5      JTAG.1" "P5      JTAG.2" C7.1 C8.1 C9.1 C14.1 C15.1 C16.1 C17.1 C18.1 C19.1 C20.1 C21.1 C22.1 C23.1 C26.1 C27.1 C30.1 C42.1 C44.1 C46.1 C49.1 D2.1 D3.1 D4.1 J1.1 J2.3 J3.9 J3.11 R1.2 R2.2 R3.2 R10.2 R11.2 R22.1 R34.1 R35.1 R36.1 R37.1 U3.A6 U3.A15 U3.B4 U3.D8 U3.E5 U3.E11 U3.H14 U3.J11 U3.J17 U3.K1 U3.M6 U3.N9 U3.N12 U3.N16 U3.P15 U3.U13 U4.1 U4.3 U4.9 U4.14 U4.27 U4.43 U4.49 U5.1 U5.20 U6.20 U7.1 U7.20 U8.20 U9.12 U9.37 U10.14 U11.23 U11.30 U11.42 U13.2 U13.4 U17.4 U18.16 | length 10142.4
  Top Layer w9.45: 4449.84,3723 U11.42@4449.84,3821.42 ; 4503,3650.16 U11.30@4601.42,3650.16 ; U11.23@4528.58,3498.58 4528.58,3545.58 v1(4536,3553)
  Top Layer w10: v1(3368,2980) 3415,2980 3450,3015 U8.20@3564.57,3015 ; v1(3418,4768) 3546.74,4768 3554.74,4776 C20.1@3554.74,4801.21 ; v1(3528,3528) 3528,3675 U6.20@3564.57,3675 ; C21.1@3784.74,4796.21 3784.74,4820 3791.74,4827 3934,4827 3957,4804 4004.74,4804 C22.1@4004.74,4801.21 v2(4004.74,4755.26) 4004.74,4709.74 v1(3938,4643) ; v1(4144,3138) 4144,3102.74 4152,3094.74 C16.1@4177.58,3094.74 C17.1@4298.79,3094.74 ; v1(4170,4658) 4239.74,4727.74 v2(4239.74,4755.26) C23.1@4239.74,4801.21 ; v1(4418.21,3160.26) C15.1@4451.21,3160.26 ; 4449.84,3723 4440,3713.16 v1(4440,3660) 4493.16,3660 4503,3650.16 ; U11.42@4449.84,3821.42 v2(4449.84,3879.84) ; v1(4453,4032) 4453,4030 4478,4005 U7.20@4554.57,4005 ; C7.1@4515.9,6232.37 4555,6271.47 v1(4555,6394) ; v2(4528.58,3441.42) U11.23@4528.58,3498.58 ; v1(4536,4536) 4536,4610 U5.20@4564.57,4610 ; U11.30@4601.42,3650.16 v2(4659.84,3650.16) v2@4660,3650 ; v1(4705.44,5277.31) U18.16@4705.44,5330.31 ; C8.1@4709.74,6231.21 4709.74,6230 4710.95,6230 v2(4740,6230) ; U7.1@4840,4005 4873,4005 4873,3869 v1(4865,3861) ; U5.1@4850,4610 v2(4930,4610) 4966,4610 v1(5040,4536) 5040,4413.01 5056,4397.01 v2(5077.99,4397.01) U4.43@5132.56,4397.01 5168,4397.01 5172,4393.01 5172,4212.03 5168,4208.03 U4.49@5132.56,4208.03 v2(5076.97,4208.03) ; v1(4887,6368) 4887,6324.74 4909.74,6302 C9.1@4909.74,6231.21 ; v2(5055.42,5775.42) R3.2@5085.47,5775.42 ; v1(5174,5345) 5174.47,5345.47 R37.1@5324.58,5345.47 v2(5324.58,5374.58) ; v1(5178,5874) 5162,5874 5085.47,5797.47 R3.2@5085.47,5775.42 ; v2(5229.58,5759.58) R22.1@5229.58,5730.47 5190.05,5770 5085.47,5770 R3.2@5085.47,5775.42 ; v1(5456,4295) 5489.48,4295 5497,4302.52 5547.48,4302.52 ; R36.1@5494.58,3795.47 v2(5494.58,3824.58) ; v1(5534.91,4869.45) U4.27@5577.44,4869.45 ; v1(5544,4032) 5544,4050.55 ; v1(5620,5335) 5620.47,5335.47 R35.1@5674.58,5335.47 ; v2(5630,4460) U4.14@5577.44,4460 5542,4460 5538,4456 5538,4312 5547.48,4302.52 ; v2(5632.48,4302.52) U4.9@5577.44,4302.52 5547.48,4302.52 ; v2(5633.54,4113.54) U4.3@5577.44,4113.54 5547.54,4113.54 5538,4104 5538,4056 5543.45,4050.55 5544,4050.55 ; v2(5635,4050) 5634.45,4050.55 U4.1@5577.44,4050.55 5544,4050.55 ; v1(5792,4713) 5807.98,4728.98 U3.A15@5988.03,4728.98 ; v1(5817,4437) 5809,4437 5809,4433.87 5840.87,4433.87 5852.51,4445.51 U3.A6@5988.03,4445.51 5973.41,4430.89 v1(5970.89,4430.89) ; v1(6152,4948) 6151.34,4948 6151.34,4928.8 6240,4840.14 U3.J17@6240,4791.97 ; 6271.5,4279.04 U3.K1@6271.5,4288.03 6271.5,4290.01 v1(6285.74,4304.26) ; U9.37@6291.98,3681.54 v2(6366.54,3681.54) ; U3.N12@6365.98,4634.49 6378.47,4622 v1(6378.47,4620.02) ; U3.U13@6491.97,4665.98 6528,4665.98 6552,4641.98 6552,4632 v1(6568,4616) ; U9.12@7060,3681.54 7123.46,3681.54 v2(7125,3680) ; v1(7190,5080) 7289.11,5080 R10.2@7329.58,5120.47 v2(7329.58,5090.42) ; v2(7249.58,3239.58) R2.2@7219.53,3239.58 7219.53,3328 7245.53,3354 7296,3354 ; v2(7250,3400) 7250.42,3399.58 R34.1@7279.53,3399.58 7279.53,3370.47 7296,3354 ; v1(7321,5980) 7321,5904 7342.76,5882.24 U17.4@7427.6,5882.24 v2(7427.6,5842.4) v2@7430,5840 ; v1(7350,3354) 7296,3354 ; v2(7488.79,3656.21) C44.1@7488.79,3709.74 ; v1(7560,4536) 7560,4494.47 7584,4470.47 D4.1@7614.58,4470.47 v2(7614.58,4499.58) ; v2(7614.58,4694.58) D3.1@7614.58,4665.47 7645,4695.89 7645,4845.47 7640,4850.47 D2.1@7614.58,4850.47 ; v2(7614.58,4879.58) D2.1@7614.58,4850.47 ; v2(7663.79,3133.79) C14.1@7663.79,3104.74 7717.26,3104.74 7734,3088 v1(7734,2989) ; v1(7736,4880) 7644.11,4880 D2.1@7614.58,4850.47 ; v2(7843.8,3758.8) C49.1@7843.8,3699.56 C49.1@7856,3699.56 ; v2@7893.79,3138.79 C26.1@7893.79,3109.74 7905,3109.74 v1(7905,2992) ; v2(8051.21,4628.79) C27.1@8080.26,4628.79 ; v2(8051.21,4768.79) C30.1@8080.26,4768.79 C27.1@8080.26,4628.79 ; v1(8064,4536) 8064,4563.74 8080.26,4580 C27.1@8080.26,4628.79 ; v1(8064,5040) 8130.2,5040 8146.2,5056 v2(8146.2,5056.2) C46.1@8146.2,5110.44 ; v2(8130,3140) 8130,3110.95 C19.1@8128.79,3109.74 8168.26,3109.74 8190,3088 v1(8190,2992) ; v1(8225,5755) 8180.47,5710.47 R11.2@8180.47,5615.42 v2(8225.42,5615.42) ; C18.1@8333.79,3094.74 8333.79,3104.74 C18.1@8333.79,3113.79 ; 8333.79,3123.79 8333.79,3115 C18.1@8333.79,3113.79 ; v2(8335,3115) C18.1@8333.79,3113.79 ; C18.1@8338.79,3104.74 8431,3104.74 8444.26,3118 v1(8518,3118) ; v2(8420.42,3825.42) R1.2@8450.47,3825.42 ; v2(8557.13,6067.87) U13.4@8557.13,6160 8557.13,6074.87 v1(8568,6064) ; v1(8708,6179) 8742,6179 8761,6160 U13.2@8822.87,6160 v2(8822.87,6117.87) ; v1(8735,3762.53) 8734.79,3762.74 8748,3762.74 8756,3754.74 C42.1@8783.79,3754.74
  Top Layer w12.6: v1(5972.28,4744.72) U3.A15@5988.03,4728.98 ; v1(6003.78,4366.77) U3.B4@6019.53,4382.52 ; v1(6066.77,4492.76) U3.D8@6082.52,4508.5 ; v1(6098.27,4398.27) U3.E5@6114.02,4414.02 ; v1(6098.27,4618.74) U3.E11@6114.02,4602.99 ; v1(6192.76,4713.23) U3.H14@6208.5,4697.48 ; v1(6224.25,4618.74) U3.J11@6240,4602.99 ; v1(6224.25,4807.72) U3.J17@6240,4791.97 ; U3.M6@6334.49,4445.51 v1(6350.24,4429.76) ; U3.N9@6365.98,4540 v1(6381.73,4524.25) ; U3.N16@6365.98,4760.47 v1(6381.73,4776.22) ; U3.P15@6397.48,4728.98 v1(6413.23,4744.72) ; U3.U13@6491.97,4665.98 v1(6507.72,4681.73)
  Top Layer w20: v2(3554.74,4750.26) C20.1@3554.74,4801.21 ; U8.20@3564.57,3015 v2(3630,3015) ; U6.20@3564.57,3675 v2(3630,3675) ; v2(3784.74,4750.26) C21.1@3784.74,4796.21 ; v2(4004.74,4755.26) C22.1@4004.74,4801.21 ; C16.1@4175,3097.31 v2(4175,3120) ; v2(4239.74,4755.26) C23.1@4239.74,4801.21 ; C17.1@4298.79,3094.74 v2(4298.79,3123.79) ; v2(4495,4610) U5.20@4564.57,4610 ; C7.1@4515.9,6232.37 v2(4545,6232.37) ; U7.20@4554.57,4005 v2(4620,4005) ; C8.1@4710.95,6230 v2(4740,6230) ; v2(4775,4005) U7.1@4840,4005 ; U5.1@4850,4610 v2(4930,4610) ; C9.1@4910.95,6230 v2(4940,6230)
  other v1: 4175,3120 4740,6230 4545,6232.37
  other v2: 7895,3140
VDD50: C31.1 C47.1 C52.1 DS1.1 DS1.6 DS2.1 DS2.6 J2.1 S1.2 U13.3 U14.3 U16.10 U16.16 U19.10 U19.16 USB-HOST.1 | length 11269.6
  Top Layer w10: C31.1@5778.79,5714.74 5925,5860.95 v1(5925,5955) ; v2(6185.44,5995.44) C52.1@6231.2,5995.44 6311.64,5915 6315.44,5915 ; v2(6315.44,5764.56) 6315.44,5915 ; v2(6315.44,6264.56) 6315.44,5915 ; U16.16@6495,5630 v2(6495,5765) 6640,5765 DS1.6@6715,5840 ; U16.10@7095,5630 7095,5755 DS2.6@7215,5875 ; v2(8130,6330) 8130.35,6330.35 USB-HOST.1@8130.35,6885.53 ; U13.3@8822.87,6250.55 v2@8822.87,6327.87 ; S1.2@9016.94,5920.55 9016.94,5917 9045,5917 9045,5907.53 S1.2@9029.96,5907.53 ; J2.1@9050,3230 J2.1@9050,3245
  Top Layer w20: C47.1@5638.79,5714.74 C31.1@5778.79,5714.74 ; DS1.6@6715,5840 DS1.6@6715,5865 ; U13.3@8822.87,6250.55 8844.45,6250.55 8895,6200 8895,5982.68 U14.3@8832.87,5920.55 S1.2@9016.94,5920.55 ; S1.2@9029.96,5907.53 9029.96,5815.04 9100,5745 9100,3295 J2.1@9050,3245
  Mid-Layer2 w10: U19.10@5370,6000 5415,5955 v1(5925,5955) U19.16@5970,6000 5974.56,5995.44 v2(6185.44,5995.44) ; v2(6315.44,5764.56) v2@6494.56,5764.56 ; v2(6315.44,6264.56) 6660.08,6264.56 6699.04,6303.53 6730.96,6303.53 6759.49,6275 DS2.1@7015,6275 7150,6275 7205,6330 v2(8130,6330) v2(8825,6330) 8825,6213 8487,5875 DS2.6@7215,5875
VDDIN: CN1.2 S1.1 | length 1314.7
  Top Layer w4: v1(8915.48,5726.73) S1.1@9029.96,5612.25
  Mid-Layer3 w4: v1(8915.48,5726.73) CN1.2@8915.48,6879.53
VDDRTC: D5.1 J2.43 U3.M12 | length 3953.6
  Top Layer w4: U3.M12@6334.49,4634.49 v1(6350.24,4650.24)
  Mid-Layer2 w4: v1(7607,5497) 9009,5497 9050,5456 J2.43@9050,5330
  Mid-Layer3 w4: v1(6350.24,4650.24) 6365.98,4665.98 6524.84,4665.98 6584.98,4665.98 7416,5497 ; v1(7607,5497) 7416,5497 ; D5.1@7645,6140 7645,5726 7416,5497
VF-VS: U3.K4
VL-HS: U3.J6 | length 203.4
  Top Layer w4: v1(6224.25,4429.76) U3.J6@6240,4445.51
  Mid-Layer3 w4: v1(6224.25,4429.76) 6240,4414.02 6240,4255.16
VM-VDEN: U3.K2
XMON: U3.P11
XTIPLL: C3.1 U3.H17 X1.2 | length 4880.4
  Top Layer w4: v1(4756.85,5919) C3.1@4756.85,6030 ; 6208.5,4800 6224,4784.5 6224,4776.47 ; 6208.5,4824.84 U3.H17@6208.5,4791.97 6224,4776.47 ; v1(6262,4537) v1(6262,4560) 6262,4624 6254,4632 6254,4738 6248,4744 6231.32,4744 6225,4750.32 6225,4751.32 ; 6224,4776.47 6224,4751.32 6225,4751.32 ; 6224,4776.47 6225,4775.47 6225,4751.32
  Mid-Layer3 w4: v1(6225,5790) 6240,5775 6240,4737 6208,4705 6208,4604.24 6233.24,4579 6243,4579 v1(6262,4560)
  Bottom Layer w4: v1(4756.85,5919) 6096,5919 v1(6225,5790) ; X1.2@5821.69,3554.53 5545,3831.22 5545,3880 5587,3922 5587,3928 5837,4178 6096,4178 6114,4196 6114,4472 6127,4485 6210,4485 v1(6262,4537)
XTIRTC: C5.1 U3.P16 X2.2 | length 5820.8
  Top Layer w4: v1(4056.85,5764) C5.1@4056.85,6030 ; U3.P16@6397.48,4760.47 v1@6413.23,4776.22 ; v1(6414,4776.99) v1@6413.23,4776.22 ; v1(6438,5013) 6413.23,4988.23 6413.23,4824.84 v1@6413.23,4776.22
  Mid-Layer2 w4: v1(6414,4776.99) v1(6414,5104)
  Bottom Layer w4: v1(4056.85,5764) 4980,5764 5285,5459 5852,5459 6207,5104 v1(6414,5104) ; v1(6438,5013) 8697.2,5013 8709.2,5025 X2.2@8709.2,5075.67
XTOPLL: C4.1 U3.H16 X1.1 | length 5214.7
  Top Layer w4: v1(6039.5,5018.5) 6113,4945 6113,4904.6 6192.76,4824.84 6192.76,4776.22 U3.H16@6208.5,4760.47 v1(6193,4775.98) ; v1(7961.85,5316) C4.1@7961.85,5380
  Mid-Layer2 w4: v1(5988,5350) 6004,5366 7911.85,5366 v1(7961.85,5316)
  Mid-Layer3 w4: X1.1@5624.69,3554.53 5624.69,3759.69 5626,3761 5626,3981 5590,4017 5590,4194 5620,4224 5711,4224 5754,4181 5754,4061 5776,4039 5835,4039 5854,4058 5854,4664 5840.32,4677.68 5840.32,4819.32 v1(6039.5,5018.5) ; v1(5988,5350) 6168,5170 6168,4939 6161,4932 6161,4861 6193,4829 v1(6193,4775.98)
XTORTC: C6.1 U3.R17 X2.1 | length 2469.5
  Top Layer w4: U3.R17@6428.98,4791.97 6428.98,4824.84 6446,4841.87 v1(6446,4932) ; v1(7494,5065) C6.1@7541.85,5065 ; v1(7541.85,5031) C6.1@7541.85,5065 ; C6.1@7541.85,5095 C6.1@7541.85,5065
  Mid-Layer2 w4: v1(6446,4932) 6579,5065 v1(7494,5065) ; v1(7541.85,5031) 7585.85,5075 8630.46,5075 X2.1@8630.46,5075.67
YMON: U3.T11 | length 70.9
  Top Layer w4: U3.T11@6460.47,4602.99 6476.22,4618.74 6524.84,4618.74
pads on no net: "P5      JTAG.17" "P5      JTAG.19" C43.2 CN1.A CN1.B J3.0 J9. J9.1 J9.4 J9.6 J9.7 J9.8 J9.9 U3.F17 U3.G2 U3.H2 U3.H3 U3.H4 U3.J15 U4.40 U9.1 U9.2 U9.3 U9.4 U9.5 U9.10 U9.11 U9.14 U9.15 U9.20 U9.21 U9.22 U9.23 U9.24 U9.25 U9.26 U9.27 U9.28 U9.33 U9.34 U9.35 U9.38 U9.39 U9.40 U9.45 U9.46 U9.47 U9.48 U10.3 U10.8 U10.11 U11.19 U11.20 U11.21 U11.46 U12.4 U12.5 U12.12 U12.13 U19.9 USB-HOST.5 USB-HOST.6

## Polygon pours and split planes (outlines as drawn)
GND on GND (split plane): 9114.9,2898.32 9094.29,2877.71 9092.69,2878.57 9088.92,2879.71 9085,2880.1 3115.1,2880.1 3115.1,6949.9 9114.9,6949.9
VDD33 on VDD33 (split plane): 9114.9,2898.32 9094.29,2877.71 9092.69,2878.57 9088.92,2879.71 9085,2880.1 3115.1,2880.1 3115.1,6949.9 9114.9,6949.9

## Text inside footprints (layer, text, board x,y; h text height)
C29: Top Overlay "+" at 3561,5451 h40 r180
D5: Top Overlay "3" at 7825.31,6005.16 h59.06; Top Overlay "1" at 7635.16,6005.16 h59.06
J1: Top Overlay "43" at 3325,5245 h50 r90; Top Overlay "44" at 3225,5245 h50 r90; Top Overlay "1" at 3325,2985 h50 r90; Top Overlay "2" at 3225,2985 h50 r90
J2: Top Overlay "43" at 9070,5390 h50 r90; Top Overlay "44" at 8970,5390 h50 r90; Top Overlay "1" at 9070,3130 h50 r90; Top Overlay "2" at 8970,3130 h50 r90
"P5      JTAG": Top Overlay "1" at 5355,3145 h50; Top Overlay "2" at 5355,3245 h50; Top Overlay "19" at 6395,3145 h50; Top Overlay "20" at 6395,3245 h50